# Altium PCB pcbBoard.PcbDoc
Units mm, origin at the board's own origin, x right, y up, seen from the top; angles counter-clockwise.
Board outline 78 x 29 mm, 2 copper layers (Top Layer, Bottom Layer); 22 components, 17 nets, 64 pads, 0 vias.
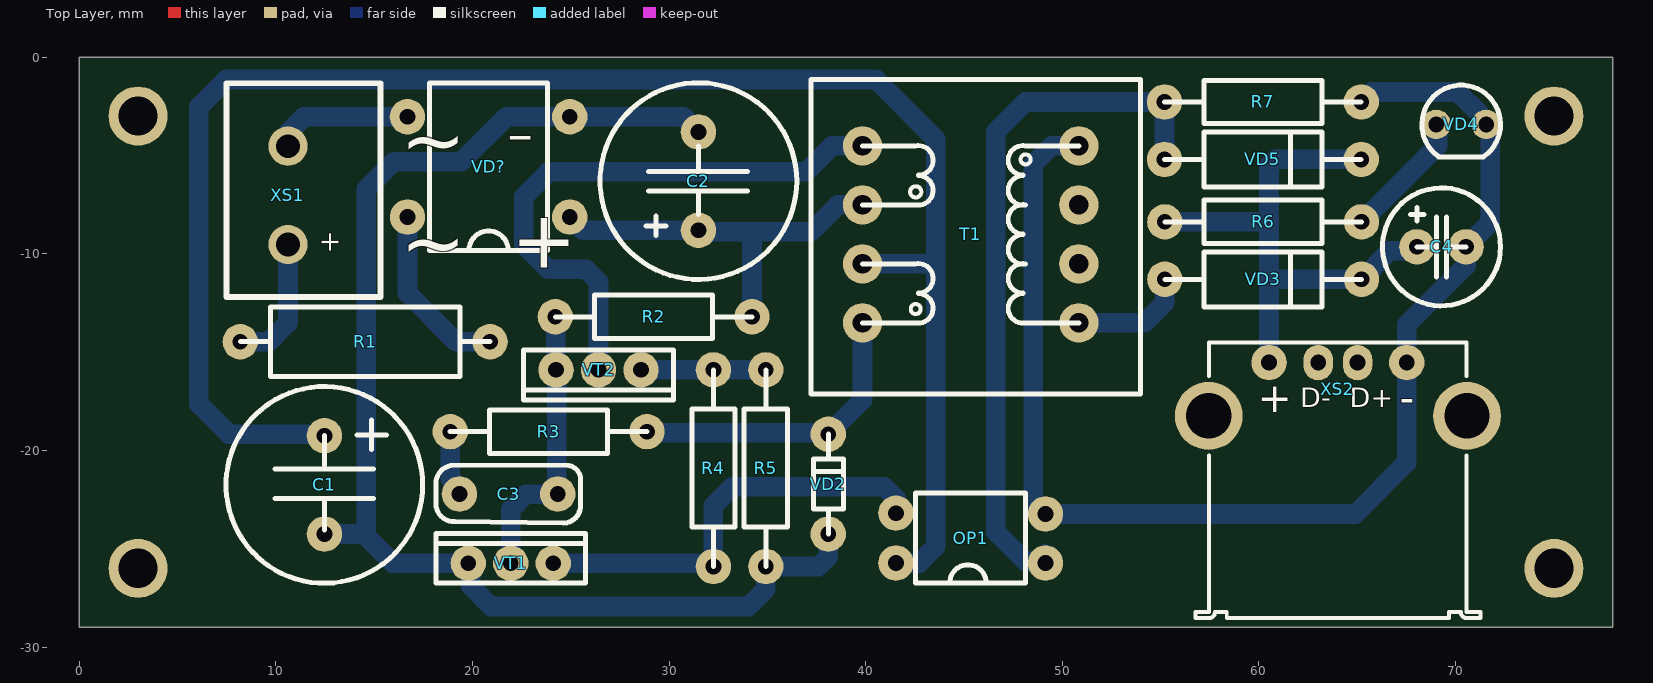
[diagram p0: Top Layer view]
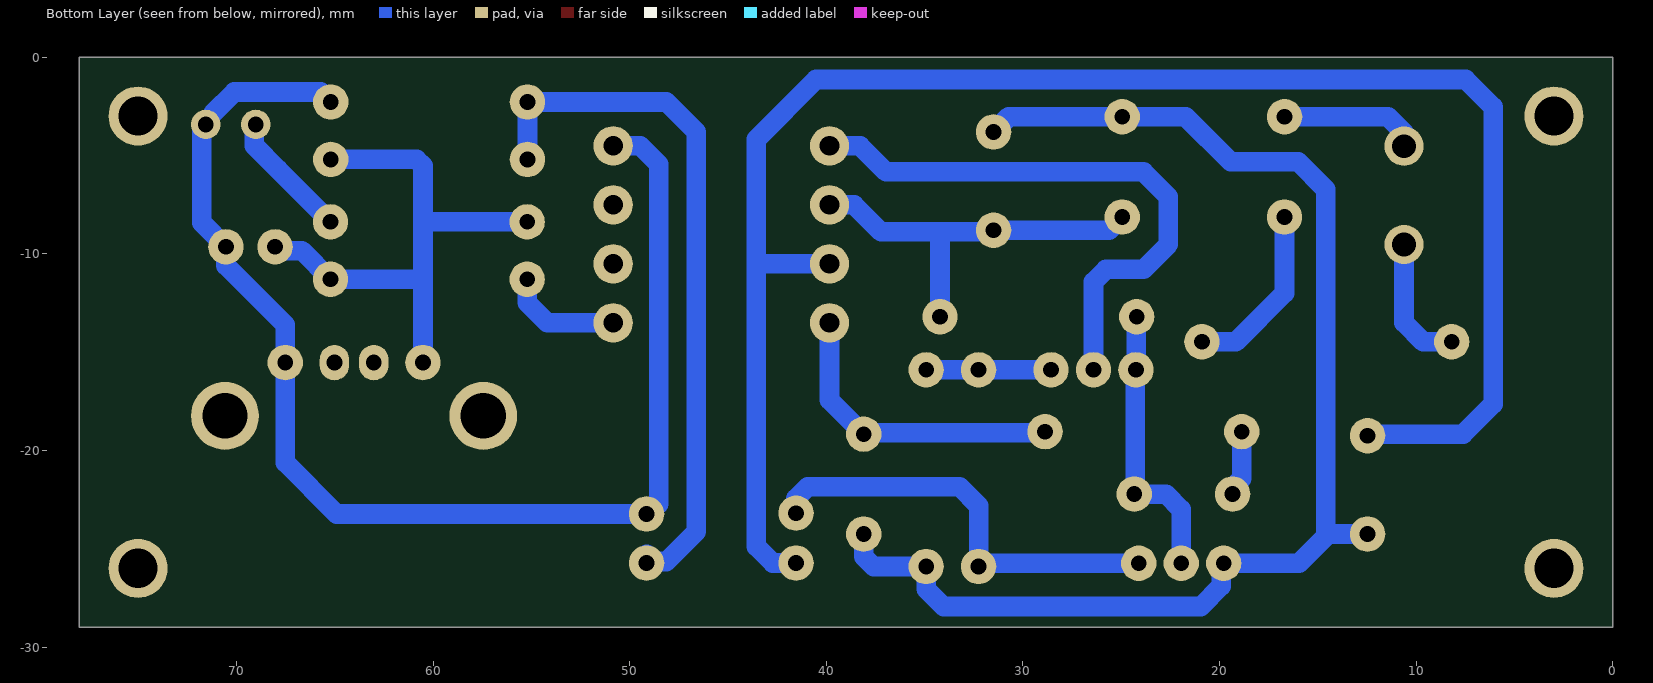
[diagram p1: Bottom Layer view, seen from below]
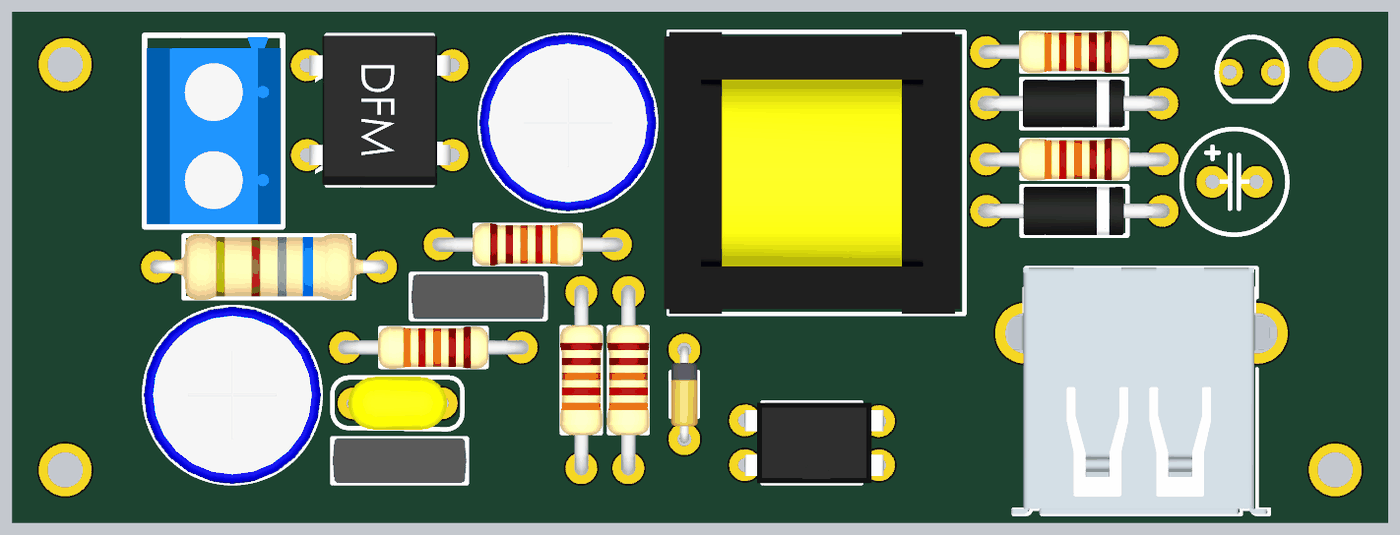
[diagram p2: 3D render of the assembled board from above, using the file's embedded part models]

## Layer stack, top to bottom
Top Solder: solder mask 0.0102, Solder Resist, Dk 3.5
Top Layer: signal copper 0.0356
Dielectric 1: dielectric 0.32, FR-4, Dk 4.8
Bottom Layer: signal copper 0.0356
Bottom Solder: solder mask 0.0102, Solder Resist, Dk 3.5

## Board outline
0,-29 0,0 78,0 78,-29

## Design rules (kind name [scope] priority, off if disabled: settings)
Clearance [All] p1: gap=0.254 ignorepadtopadclearanceinfootprint=FALSE except(0: Arc-Hole Track-Hole SMDPad-Hole THPad-Hole Via-Hole Fill-Hole Poly-Hole Region-Hole Text-Hole)
PolygonConnect [All] p1: connectstyle=Relief reliefconductorwidth=0.254 reliefentries=4 polygonreliefangle="90 Angle" airgapwidth=0.254
RoutingVias [All] p1: holewidth=0.711 width=1.27 viastyle="Through Hole" minholewidth=0.711 minwidth=1.27 maxholewidth=0.711 maxwidth=1.27
SolderMaskExpansion [All] p1: expansion=0.102
Width [All] p1: maxlimit=1 minlimit=0.5 preferedwidth=0.6
30 further rules are at their usual default settings.

## Components (designator, comment, footprint, x,y, rotation, side; value= is the part's Value field where it differs from the comment)
C1 "10u" "ECAP: 10x20" 12.478,-21.757 r270 top
C2 "2.2u" "ECAP: 10x12" 31.496,-6.31 r90 top
C3 "5n6" "CAP: 3x4" 21.844,-22.225 r0 top
C4 "220u" "ECAP: 6x11" 69.281,-9.652 r0 top
OP1 "PC817" DIP-4 45.339,-24.463 r180 top
R1 "RES 2W_1Ohm" "RES: 0.5W" 14.552,-14.478 r0 top
R2 "1M" "RES: 0.25W" 29.22,-13.208 r0 top
R3 "680" "RES: 0.25W" 23.876,-19.05 r180 top
R4 "680" "RES: 0.25W" 32.258,-20.905 r270 top
R5 "10" "RES: 0.25W" 34.925,-20.905 r270 top
R6 "680" "RES: 0.25W" 60.212,-8.382 r180 top
R7 "220" "RES: 0.25W" 60.198,-2.286 r180 top
T1 "200x15x7" TSD-0816 45.339,-9.017 r0 top locked
VD2 "1N4148" DO-35 38.1,-21.717 r90 top
VD3 "1N5819" DO-41 60.212,-11.303 r0 top
VD4 "Model" "LED: RED" 70.281,-3.429 r0 top
VD5 "1N4730A" DO-41 60.198,-5.207 r0 top
VD? "DB106" DFM 20.828,-5.588 r180 top
VT1 "BD135" "TO-126 / SOT-32" 21.956,-25.741 r0 top
VT2 "MJE13003" "TO-126 / SOT-32" 26.416,-15.905 r180 top
XS1 "306-021-12" "KLS2-306-021-12 - duplicate" 10.549,-7.084 r90 top
XS2 "USB 2.0" "USB 2.0" 63.738,-22 r0 top

## Footprints (in the part's own frame and the unit in brackets; to place one, negate y for a bottom-side part, rotate by r counter-clockwise, add the part's x,y. Pads: shape width x height; smd on the part's side, far side on the other; paste and mask are expansions set on the pad)
"CAP: 3x4" [mm] "3x4x5"
  round 1.8 hole 0.8: 1(-2.5,0) 2(2.5,0)
  silkscreen extent -3.7,-1.48 3.67,1.47, body extent -2.8,-1.5 2.8,1.5, height 5
DFM [mm]
  round 1.8 hole 0.8: 1(-4.127,2.55) 2(-4.127,-2.55) 3(4.127,-2.55) 4(4.122,2.55)
  silkscreen extent -3,-4.25 3,4.26, body extent -4,-4.25 4,4.26, height 4.25
DIP-4 [mm]
  round 1.8 hole 0.8: 1(-3.8,1.27) 2(-3.8,-1.23) 3(3.8,-1.27) 4(3.8,1.27)
  silkscreen extent -2.78,-2.29 2.8,2.29, body extent -4.05,-2.29 3.82,2.29, height 4.3
DO-35 [mm]
  round 1.8 hole 0.8: 1(-2.54,0) 2(2.54,0)
  silkscreen extent -2.54,-0.76 2.54,0.76, body extent -2.75,-0.75 2.75,0.75, height 1.75
DO-41 [mm]
  round 1.8 hole 0.8: 1(-5,0) 2(5,0)
  silkscreen extent -5,-1.4 5,1.4, body extent -5.48,-1.36 5.38,1.36, height 2.86
"ECAP: 6x11" [mm] "6x11x2.5"
  round 1.8 hole 0.8: 1(-1.25,0) 2(1.25,0)
  silkscreen extent -3,-3 3,3, body extent -3.01,-3 3,3, height 8
"ECAP: 10x12" [mm]
  round 1.8 hole 0.8: 1(-2.5,0) 2(2.5,0)
  silkscreen extent -5,-5 5,5, body extent -5.03,-5.03 5.03,5.03, height 12.53
"ECAP: 10x20" [mm] "10x20x5"
  round 1.8 hole 0.8: 1(-2.5,0) 2(2.5,0)
  silkscreen extent -5,-5 5,5, body extent -5.03,-5.03 5.03,5.03, height 16.03
"KLS2-306-021-12 - duplicate" [mm]
  round 2 hole 1.2: 1(-2.449,-0.076) 2(2.551,-0.076)
  silkscreen extent -5.12,-4.78 5.75,3.05, body extent -4.97,-4.68 5.63,2.92, height 10
"LED: RED" [mm]
  round 1.5 hole 0.8: 1(-1.27,0) 2(1.27,0)
  silkscreen extent -2,-1.65 2,2, body extent -1.99,-1.52 1.99,1.97, height 5.38
"RES: 0.5W" [mm]
  round 1.8 hole 0.8: 1(-6.35,0) 2(6.35,0)
  silkscreen extent -6.35,-1.78 6.35,1.78, body extent -6.72,-1.87 6.73,1.88, height 3.88
"RES: 0.25W" [mm]
  round 1.8 hole 0.8: 1(-5,0) 2(5,0)
  silkscreen extent -5,-1.1 5,1.1, body extent -5.39,-1.2 5.41,1.2, height 2.6
"TO-126 / SOT-32" [mm]
  round 1.8 hole 0.8: 1(2.159,0) 2(0,0) 3(-2.159,0)
  silkscreen extent -3.81,-1.02 3.81,1.52, body extent -3.8,-1 3.8,1.55, height 13.19
TSD-0816 [mm]
  round 2 hole 1: 1(-5.5,4.5) 2(-5.5,1.5) 3(-5.5,-1.5) 4(-5.5,-4.5) 5(5.5,-4.5) 6(5.5,-1.5) 7(5.5,1.5) 8(5.5,4.5)
  silkscreen extent -8.13,-8.13 8.64,7.87, body extent -8.4,-8.13 8.4,7.87, height 14.83
"USB 2.0" [mm]
  round 1.8 hole 0.8: 1(-3.227,6.463) 4(3.773,6.463)
  oval 1.5x1.8 hole 0.8: 2(-0.727,6.463) 3(1.273,6.463)
  round 3.45 hole 2.3: Shell(-6.297,3.753) Shell(6.843,3.753)
  silkscreen extent -6.98,-6.53 7.52,7.47, body extent -7.87,-6.51 8.12,7.49, height 7.63

## Part data
C1: library part "ECAP: 10u_400v", ComponentLink1Description=market, ComponentLink1URL=https://www.chipdip.ru/product0/22832, ComponentLink2Description=datasheet, ComponentLink2URL=https://static.chipdip.ru/lib/235/DOC000235479.pdf
C2: library part "ECAP: 2.2u_400v", ComponentLink1Description=market, ComponentLink1URL=https://www.chipdip.ru/product0/708508021, ComponentLink2Description=datasheet, ComponentLink2URL=https://static.chipdip.ru/lib/235/DOC000235479.pdf
C3: library part "CAP: 56P", ComponentLink1Description=market, ComponentLink1URL=https://www.chipdip.ru/product0/48477, ComponentLink2Description=datasheet, ComponentLink2URL=https://static.chipdip.ru/lib/056/DOC000056282.pdf
C4: library part "ECAP: 220u_10v", ComponentLink1Description=market, ComponentLink1URL=https://www.chipdip.ru/product0/9000274034, ComponentLink2Description=datasheet, ComponentLink2URL=https://static.chipdip.ru/lib/235/DOC000235479.pdf
R1: library part "RES 0.5W", ComponentLink1Description=market, ComponentLink1URL=https://www.chipdip.ru/product0/24035, ComponentLink2Description=datasheet, ComponentLink2URL=https://static.chipdip.ru/lib/055/DOC000055622.pdf
R2 R3 R4 R5 R6 R7: library part "RES 0.25W", ComponentLink1Description=market, ComponentLink1URL=https://www.chipdip.ru/product0/51741, ComponentLink2Description=datasheet, ComponentLink2URL=https://static.chipdip.ru/lib/056/DOC000056035.pdf
T1: library part TRANSFORM
VD4: library part LED:RED, ComponentLink1Description=market, ComponentLink1URL=https://www.chipdip.ru/product/gnl-3012hd, ComponentLink2Description=datasheet, ComponentLink2URL=https://static.chipdip.ru/lib/773/DOC002773602.pdf
OP1: ComponentLink1Description=market, ComponentLink1URL=https://www.chipdip.ru/product/fod817b, ComponentLink2Description=datasheet, ComponentLink2URL=https://static.chipdip.ru/lib/297/DOC000297284.pdf
VD?: ComponentLink1Description=market, ComponentLink1URL=https://www.chipdip.ru/product/df08m, ComponentLink2Description=datasheet, ComponentLink2URL=https://static.chipdip.ru/lib/151/DOC000151037.pdf
VT1: ComponentLink1Description=market, ComponentLink1URL=https://www.chipdip.ru/product/bd135, ComponentLink2Description=datasheet, ComponentLink2URL=https://static.chipdip.ru/lib/011/DOC001011692.pdf
VT2: ComponentLink1Description=market, ComponentLink1URL=https://www.chipdip.ru/product/mje13003-st13003, ComponentLink3Description=datasheet, ComponentLink3URL=https://static.chipdip.ru/lib/204/DOC000204730.pdf
XS1: ComponentLink1Description=market, ComponentLink1URL=https://www.chipdip.ru/product/306-021-12, ComponentLink2Description=datasheet, ComponentLink2URL=https://static.chipdip.ru/lib/064/DOC000064100.pdf
XS2: ComponentLink1Description=market, ComponentLink1URL=https://yandex.ru/search/?clid=2285101&text=USBA-1J%20%D1%83%D0%B3%D0%BE%20%D0%B3%D0%BE%D1%81%D1%82&lr=213, ComponentLink2Description=datasheet, ComponentLink2URL=https://static.chipdip.ru/lib/063/DOC000063868.pdf

## Free pads (board coordinates)
  round 3 hole 2: 0(3,-26) 0(3,-3) 0(75,-26) 0(75,-3)

## Nets (pads, with @x,y where several pads share a name; then routed paths per layer and width w, separated by ;. In a path a pad name is that pad's centre, name@x,y a point inside that pad or via, vN(x,y) a via of type N, cw(c..) or ccw(c..) an arc to the next point about the centre after c; other vN are vias at no path point)
NetC1_1: C1.1 OP1.4 T1.3 | length 88.3
  Bottom Layer w1: C1.1 12.398,-19.177 7.62,-19.177 6.096,-17.653 6.096,-2.54 7.493,-1.143 40.523,-1.143 43.561,-4.181 43.561,-10.517 ; T1.3 43.561,-10.517 ; OP1.4 42.72,-25.733 43.561,-24.892 43.561,-10.517
NetC1_2: C1.2 C2.2 R5.2 VD2.1 VD?.2 VT1.3 | length 67
  Bottom Layer w1: C1.2 14.478,-24.257 14.605,-24.384 ; C2.2 30.724,-3.038 VD?.2 21.727,-3.038 19.431,-5.334 16.002,-5.334 14.605,-6.731 14.605,-24.384 ; VD2.1 38.1,-25.4 37.595,-25.905 R5.2 34.925,-27.051 34.036,-27.94 20.955,-27.94 19.921,-26.906 19.921,-25.865 VT1.3 15.962,-25.741 14.605,-24.384
NetC2_1: C2.1 R2.2 T1.2 VD?.1 | length 20.1
  Bottom Layer w1: VD?.1 25.628,-8.81 C2.1 31.634,-8.81 31.714,-8.89 34.22,-8.89 ; R2.2 34.22,-8.89 ; T1.2 38.584,-7.517 37.211,-8.89 34.22,-8.89
NetC3_1: C3.1 R3.2 | length 3.4
  Bottom Layer w1: R3.2 18.876,-21.432 19.344,-21.9 C3.1
NetC3_2: C3.2 R2.1 VT1.2 VT2.1 | length 14.5
  Bottom Layer w0.6: R2.1 R2.1@24.238,-13.227 ; VT2.1@24.238,-15.887 VT2.1
  Bottom Layer w1: VT1.2 21.956,-23.002 22.733,-22.225 C3.2 24.301,-22.181 24.301,-15.949 VT2.1 ; VT2.1@24.238,-15.887 R2.1@24.238,-13.227
NetC4_1: C4.1 R6.2 VD3.2 VD5.2 XS2.1 | length 27.9
  Bottom Layer w1: R6.2 60.146,-8.382 ; XS2.1 60.511,-5.529 60.833,-5.207 VD5.2 ; 60.586,-11.303 VD3.2 66.672,-9.843 67.84,-9.843 C4.1
NetC4_2: C4.2 OP1.2 R7.1 T1.8 VD4.2 XS2.4 | length 65.2
  Bottom Layer w1: OP1.2@48.514,-22.733 48.514,-5.461 49.458,-4.517 T1.8 T1.8@51.236,-4.517 ; OP1.2@49.022,-23.241 64.897,-23.241 67.511,-20.627 XS2.4 67.511,-13.619 70.531,-10.599 C4.2 71.755,-8.428 VD4.2@71.755,-3.81 ; R7.1 65.706,-1.778 70.104,-1.778 VD4.2@71.174,-2.848
NetOP1_1: OP1.1 R7.2 VD5.1 | length 35.8
  Bottom Layer w1: OP1.1@49.139,-25.287 48.772,-25.654 48.133,-25.654 46.609,-24.13 46.609,-3.81 48.133,-2.286 R7.2 VD5.1
NetOP1_3: OP1.3 R4.2 VT1.1 | length 21.9
  Bottom Layer w1: VT1.1 R4.2@32.258,-25.741 ; R4.2 R4.2@32.258,-25.741 ; OP1.3 41.539,-22.445 40.938,-21.844 33.23,-21.844 32.258,-22.816 R4.2@32.258,-25.741
NetR1_1: R1.1 XS1.1 | length 6.8
  Bottom Layer w1: R1.1 9.652,-14.478 10.626,-13.504 XS1.1
NetR1_2: R1.2 VD?.4 | length 9.1
  Bottom Layer w1: VD?.4 16.706,-12.007 19.177,-14.478 R1.2
NetR3_1: R3.1 T1.4 VD2.2 | length 15.7
  Bottom Layer w1: R3.1 28.94,-19.113 38.036,-19.113 VD2.2 39.839,-17.438 T1.4
NetR4_1: R4.1 R5.1 VT2.3 | length 6.6
  Bottom Layer w1: VT2.3 32.131,-15.905 34.798,-15.905 R5.1@35.179,-15.905
NetR6_1: R6.1 VD4.1 | length 6.6
  Bottom Layer w1: R6.1 67.877,-5.717 69.088,-4.506 VD4.1@69.088,-3.429
NetT1_1: T1.1 VT2.2 | length 29.8
  Bottom Layer w1: VT2.2 26.416,-11.43 25.781,-10.795 23.876,-10.795 22.606,-9.525 22.606,-7.112 23.876,-5.842 36.957,-5.842 38.282,-4.517 T1.1
NetT1_5: T1.5 VD3.1 | length 5.3
  Bottom Layer w1: T1.5@51.474,-13.517 54.174,-13.517 55.212,-12.479 VD3.1
NetVD?_3: VD?.3 XS1.2 | length 7.1
  Bottom Layer w1: XS1.2 10.626,-3.852 11.44,-3.038 VD?.3
pads on no net: T1.6 T1.7 XS2.2 XS2.3 XS2.Shell
copper on no net: | length 0.3
  Top Layer w0.2: -7.085,-73.787 ccw(c-6.985,-73.787) -6.985,-73.887 cw(c-6.985,-73.787) -7.085,-73.787

## Silkscreen, mask and mechanical layers (free items; w line width, h text height)
Mechanical 1:
  the board outline again, w0.5

## Text inside footprints (layer, text, board x,y; h text height)
VD?: Top Overlay "+" at 21.971,-7.239 h5 r180; Top Overlay "-" at 21.717,-2.159 h5 r180; Top Overlay "~" at 19.685,-2.159 h5 r180; Top Overlay "~" at 19.685,-7.366 h5 r180
XS1: Top Overlay "+" at 13.216,-10.005 h1.02 r90
XS2: Top Overlay "D+" at 64.627,-17.809 h1; Top Overlay "D-" at 62.087,-17.809 h1; Top Overlay "-" at 67.167,-18.063 h1.52; Top Overlay "+" at 59.928,-18.063 h1.52